# Altium PCB JacdacCableExtender 38.PcbDoc
Units mm, origin at the board's own origin, x right, y up, seen from the top; angles counter-clockwise.
Board outline 6.54 x 11 mm, 2 copper layers (Top Layer, Bottom Layer), stack 1.525 mm thick; 2 components, 3 nets, 21 pads, 4 vias.
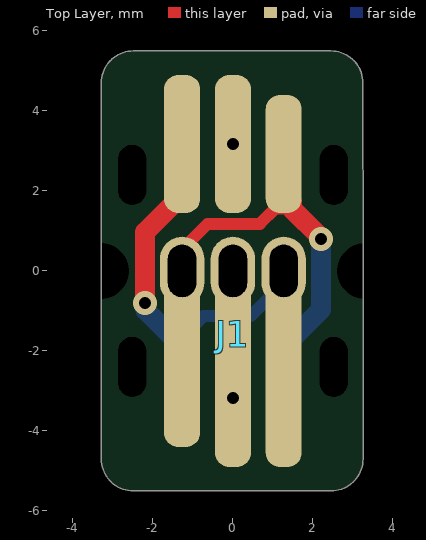
[diagram p0: Top Layer view]
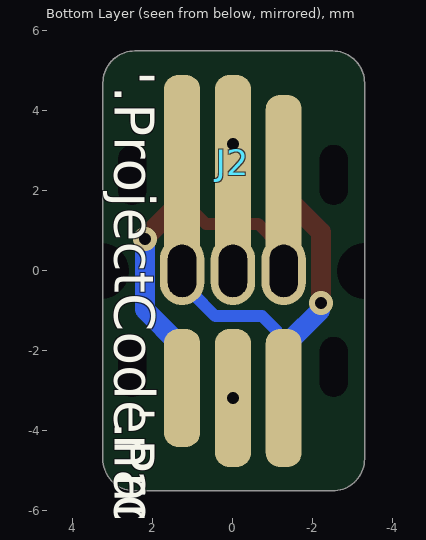
[diagram p1: Bottom Layer view, seen from below]

## Layer stack, top to bottom
Top Solder: solder mask 0.0102, Solder Resist, Dk 3.5
Top Layer: signal copper 0.0356
Dielectric 1: core 1.454, FR-4, Dk 4.2
Bottom Layer: signal copper 0.0356
Bottom Solder: solder mask 0.0102, Solder Resist, Dk 3.5

## Board outline
-3.29,-4.7 -3.29,0.35 -3.29,4.7 cw(c-2.49,4.7) -2.49,5.5 2.45,5.5 cw(c2.45,4.7) 3.25,4.7 3.253,0.35 3.253,-4.7 cw(c2.451,-4.699) 2.45,-5.5 -2.49,-5.5 cw(c-2.49,-4.7)

## Design rules (kind name [scope] priority, off if disabled: settings)
AssemblyTestPointUsage [All] p1: valid=2
BoardOutlineClearance BoardOutlineClearance_LayerNameText [(StringText='Top Layer') Or (StringText='Bottom Layer') Or (StringText='Top Overlay') Or (StringText='Bottom Overlay')] p1: gap=0.3 ignorepadtopadclearanceinfootprint=FALSE except(0: Arc-OutlineEdge Arc-SplitContinuation Track-SplitContinuation SMDPad-SplitContinuation THPad-OutlineEdge THPad-SplitContinuation Via-SplitContinuation Fill-SplitContinuation Poly-OutlineEdge Poly-SplitContinuation Region-OutlineEdge Region-SplitContinuation Text-OutlineEdge Text-CavityEdge Text-CutoutEdge Text-SplitBarrior Text-SplitContinuation; 0.2: Fill-OutlineEdge Fill-CavityEdge Fill-CutoutEdge Fill-SplitBarrior) // do not generate errors for the text that simply highlights the layer names (for gerbers)
BoardOutlineClearance [All] p2: gap=0.3 ignorepadtopadclearanceinfootprint=FALSE except(0: Arc-OutlineEdge Arc-SplitContinuation Track-SplitContinuation SMDPad-SplitContinuation THPad-OutlineEdge THPad-SplitContinuation Via-SplitContinuation Fill-SplitContinuation Poly-OutlineEdge Poly-SplitContinuation Region-OutlineEdge Region-SplitContinuation Text-SplitContinuation; 0.2: Fill-OutlineEdge Fill-CavityEdge Fill-CutoutEdge Fill-SplitBarrior Text-OutlineEdge Text-CavityEdge Text-CutoutEdge Text-SplitBarrior)
Clearance [All] p1: gap=0.125 ignorepadtopadclearanceinfootprint=FALSE except(0: Arc-Hole Track-Hole SMDPad-Hole THPad-Hole Via-Hole Fill-Hole Poly-Hole Region-Hole Text-Hole)
DiffPairsRouting [All] p1: maxlimit=2 minlimit=0.15 mostfreqgap=0.15 toplayer_minwidth=0.15 toplayer_maxwidth=2 toplayer_prefwidth=0.15 bottomlayer_minwidth=0.15 bottomlayer_maxwidth=2 bottomlayer_prefwidth=0.15 substack1={CB9D278B-8BF5-444A-AAF4-837A2A9DF42D} toplayer_{cb9d278b-8bf5-444a-aaf4-837a2a9df42d}_minwidth=0.381 toplayer_{cb9d278b-8bf5-444a-aaf4-837a2a9df42d}_maxwidth=0.381 toplayer_{cb9d278b-8bf5-444a-aaf4-837a2a9df42d}_prefwidth=0.381 bottomlayer_{cb9d278b-8bf5-444a-aaf4-837a2a9df42d}_minwidth=0.381 bottomlayer_{cb9d278b-8bf5-444a-aaf4-837a2a9df42d}_maxwidth=0.381 bottomlayer_{cb9d278b-8bf5-444a-aaf4-837a2a9df42d}_prefwidth=0.381 substack2={826B8647-A721-4255-895A-19F9591B9CD1} toplayer_{826b8647-a721-4255-895a-19f9591b9cd1}_minwidth=0.381 toplayer_{826b8647-a721-4255-895a-19f9591b9cd1}_maxwidth=0.381 toplayer_{826b8647-a721-4255-895a-19f9591b9cd1}_prefwidth=0.381 bottomlayer_{826b8647-a721-4255-895a-19f9591b9cd1}_minwidth=0.381 bottomlayer_{826b8647-a721-4255-895a-19f9591b9cd1}_maxwidth=0.381 bottomlayer_{826b8647-a721-4255-895a-19f9591b9cd1}_prefwidth=0.381 substack3={E64FCAF4-1BC8-437D-B1E0-0E5F2DC0F59E} toplayer_{e64fcaf4-1bc8-437d-b1e0-0e5f2dc0f59e}_minwidth=0.381 toplayer_{e64fcaf4-1bc8-437d-b1e0-0e5f2dc0f59e}_maxwidth=0.381 toplayer_{e64fcaf4-1bc8-437d-b1e0-0e5f2dc0f59e}_prefwidth=0.381 bottomlayer_{e64fcaf4-1bc8-437d-b1e0-0e5f2dc0f59e}_minwidth=0.381 bottomlayer_{e64fcaf4-1bc8-437d-b1e0-0e5f2dc0f59e}_maxwidth=0.381 bottomlayer_{e64fcaf4-1bc8-437d-b1e0-0e5f2dc0f59e}_prefwidth=0.381 substack4={E61CE66C-507C-4E1E-8E83-C905434AFC1C} toplayer_{e61ce66c-507c-4e1e-8e83-c905434afc1c}_minwidth=0.381 toplayer_{e61ce66c-507c-4e1e-8e83-c905434afc1c}_maxwidth=0.381 toplayer_{e61ce66c-507c-4e1e-8e83-c905434afc1c}_prefwidth=0.381 bottomlayer_{e61ce66c-507c-4e1e-8e83-c905434afc1c}_minwidth=0.381 bottomlayer_{e61ce66c-507c-4e1e-8e83-c905434afc1c}_maxwidth=0.381 bottomlayer_{e61ce66c-507c-4e1e-8e83-c905434afc1c}_prefwidth=0.381 maxuncoupledlength=25
FabricationTestPointUsage [All] p1: valid=2 allowmultiple=FALSE
HoleSize [All] p1: absolutevalues=TRUE maxlimit=2.54 minlimit=0.2 maxpercent=80.000 minpercent=20.000
HoleToHoleClearance HoleToHoleClearance_J10_J11 [InComponent('J10') vs InComponent('J11')] p1: gap=0 allowstackedmicrovias=TRUE
HoleToHoleClearance [All] p2: gap=0.254 allowstackedmicrovias=TRUE
MinimumSolderMaskSliver [All] p1: minsoldermaskwidth=0.005
PlaneClearance [All] p1: clearance=0.3
PlaneConnect [All] p1: planeconnectstyle=Relief reliefexpansion=0.5 reliefentries=4 reliefconductorwidth=0.2 reliefairgap=0.3
PolygonConnect "PolygonConnect GND" [isVIA] p1: connectstyle=Relief reliefconductorwidth=0.2 reliefentries=4 polygonreliefangle="90 Angle" airgapwidth=0.2
PolygonConnect [All] p2: connectstyle=Relief reliefconductorwidth=0.2 reliefentries=4 polygonreliefangle="90 Angle" airgapwidth=0.2
RoutingVias [All] p1: holewidth=0.3 width=0.6 viastyle="Through Hole" minholewidth=0.3 minwidth=0.6 maxholewidth=0.3 maxwidth=0.8
ShortCircuit ShortCircuit_J10_J11 [InComponent('J10') vs InComponent('J11')] p1: allowed=TRUE
ShortCircuit [All] p2: allowed=FALSE
SilkToSilkClearance [All] p1: silktosilkclearance=0.001
SilkToSolderMaskClearance [IsPad] p1: minsilkscreentomaskgap=0.05 clearancetoexposedcopper=TRUE
SolderMaskExpansion [All] p1: expansion=0.075 istentingtop=FALSE
Width [All] p1: maxlimit=2 minlimit=0.15 preferedwidth=0.15 substack1={CB9D278B-8BF5-444A-AAF4-837A2A9DF42D} substack2={826B8647-A721-4255-895A-19F9591B9CD1} substack3={E64FCAF4-1BC8-437D-B1E0-0E5F2DC0F59E} substack4={E61CE66C-507C-4E1E-8E83-C905434AFC1C} minimp=50.000000 maximp=50.000000 favimp=50.000000
19 further rules are at their usual default settings.

## Components (designator, comment, footprint, x,y, rotation, side; value= is the part's Value field where it differs from the comment)
J1 "Jacdac edge connector" JACDAC_EDGE_CONNECTOR_0.2mm_T&G#1 0,0.25 r180 top
J2 "Jacdac edge connector" JACDAC_EDGE_CONNECTOR_0.2mm_T&G#2 0,-0.25 r180 bottom

## Footprints (in the part's own frame and the unit in brackets; to place one, negate y for a bottom-side part, rotate by r counter-clockwise, add the part's x,y. Pads: shape width x height; smd on the part's side, far side on the other; paste and mask are expansions set on the pad)
JACDAC_EDGE_CONNECTOR_0.2mm_T&G#1 [mm] "JacDac 3 pin connector with traces for 0.2mm T&G"
  rrect78% 0.9x2.95 smd far side paste-1 mask+0: 1(-1.27,3.175)
  rrect78% 0.9x4.3 smd paste-1 mask+0: 1(1.27,2.5)
  oval 1.11x1.71 hole 0.71 slot 1.31 at 90 deg paste-0.254 mask+0: 1(1.27,0.25) 2(0,0.25) 3(-1.27,0.25)
  rrect78% 0.9x3.45 smd far side paste-1 mask+0: 2(0,3.425) 3(1.27,3.425)
  rrect78% 0.9x4.8 smd paste-1 mask+0: 2(0,2.75) 3(-1.27,2.75)
  round 0 hole 0.7 slot 1.5 at 90 deg unplated: ""(-2.52,2.65) ""(2.52,2.65)
  Bottom Layer lines w0.2: -1.126,0.85 -1.186,0.85 -1.27,0.85
JACDAC_EDGE_CONNECTOR_0.2mm_T&G#2 [mm] "JacDac 3 pin connector with traces for 0.2mm T&G"
  rrect78% 0.9x2.95 smd far side paste-1 mask+0: 1(-1.27,3.175)
  rrect78% 0.9x4.3 smd paste-1 mask+0: 1(1.27,2.5)
  rrect78% 0.9x4.8 smd paste-1 mask+0: 2(0,2.75) 3(-1.27,2.75)
  rrect78% 0.9x3.45 smd far side paste-1 mask+0: 2(0,3.425) 3(1.27,3.425)
  round 0 hole 0.7 slot 1.5 at 90 deg unplated: ""(-2.52,2.65) ""(2.52,2.65)
  Bottom Layer lines w0.2: -1.126,0.85 -1.27,0.85
  Bottom Layer lines w0.3: 1.126,0.7 1.126,0.929 0.63,1.425

## Part data
J1 J2: "3 pin Jacdac edge connector 1.27mm pitch", Manufacturer Part Number=JACDAC_EDGE_CONNECTOR, Checked By=?, ComponentLink1Description="Yuliang JACDAC cable connector drawing online", ComponentLink1URL=https://github.com/microsoft/jacdac-mdk/blob/main/connector/JACDAC-Connector-by-Yuliang-2020-11-28.pdf, ComponentLink2Description="JACDAC PCB edge connector spec onlin", ComponentLink2URL=https://github.com/microsoft/jacdac-mdk/blob/main/connector/JACDAC_PCB_Edge_Connector_Drawing_JD-PEC-01_rev_01.pdf, Created By="D. Gakure", PCB Type="1.6mm FR4"

## Free pads (board coordinates)
  round 0 hole 1.4 unplated: 9(-3.3,0) 9(3.3,0)

## Via types
v1: diameter 0.6, hole 0.3, Top Layer to Bottom Layer, tented both sides, 4 vias

## Nets (pads, with @x,y where several pads share a name; then routed paths per layer and width w, separated by ;. In a path a pad name is that pad's centre, name@x,y a point inside that pad or via, vN(x,y) a via of type N, cw(c..) or ccw(c..) an arc to the next point about the centre after c; other vN are vias at no path point)
NetJ1_1: J1.1 J2.1 | length 6.6
  Top Layer w0.3: -0.63,1.175 0.675,1.175 1.063,1.563 J2.1@1.307,1.563
  Top Layer w0.5: J2.1@1.27,1.92 1.28,1.92 1.474,1.726 1.474,1.553 2.2,0.827 v1(2.2,0.8)
  Bottom Layer w0.5: J1.1@1.315,-1.855 2.2,-0.97 v1(2.2,0.8)
NetJ1_2: J1.2 J2.2
  other v1: 0,-3.175 0,3.175
NetJ1_3: J1.3 J2.3 | length 12.1
  Top Layer w0.5: v1(-2.2,-0.8) -2.2,0.97 -1.27,1.9 J2.3@-1.27,2.875
  Bottom Layer w0.3: J1.3@-1.27,-3.175 -1.27,-1.67 -1.149,-1.67 -1.094,-1.615 -1.094,-1.494 -0.73,-1.13 0.44,-1.13 1.005,-0.565 1.125,-0.565 1.189,-0.5 1.189,-0.297 J1.3@1.27,-0.216 ; J1.3@1.086,-0.4 1.086,-0.184 J1.3@1.27,0
  Bottom Layer w0.5: v1(-2.2,-0.8) -2.181,-0.819 -2.181,-0.989 -1.435,-1.735 -1.39,-1.735 -1.27,-1.855 J1.3@-1.27,-3.075
pads on no net: J1. J2.

## Other copper
Top Layer:
  text "Top Layer" at 25.001,7.65 h1.7
Bottom Layer:
  text "Bottom Layer" at 25,6.15 h1.7

## Silkscreen, mask and mechanical layers (free items; w line width, h text height)
Top Overlay:
  text "Top Overlay" at 25.001,-0.65 h1.7
Bottom Overlay:
  text "'.ProjectCodenameID'" at 2.95,5 h1 r90
  text "Bottom Overlay" at 25,-2.15 h1.7
  text "'.ProjectRevision'" at 2.95,-3.4 h1 r90
Top Paste:
  text "Top Paste" at 25.001,-3.557 h1.7
Bottom Paste:
  text "Bottom Paste" at 25,-5.035 h1.7
Top Solder:
  text "Top Solder (resist)" at 25.001,-6.357 h1.7
Bottom Solder:
  text "Bottom Solder (resist)" at 25,-7.848 h1.7
Fab Notes:
  lines w0.1: -3.312,0.38 -2.712,0.98 2.683,0.98 5.6,0.98 ; -2.635,-2.927 -1.507,-4.027 3.36,-4.027 5.585,-4.027 ; -2.612,2.78 -1.484,3.88 3.383,3.88 5.608,3.88 ; -1.08,-0.444 -0.041,-1.483 2.364,-1.483 ; 0.123,-0.444 1.161,-1.483 ; 1.322,-0.441 2.364,-1.483 ; 2.635,-2.802 3.838,-4.027 ; 2.658,2.655 3.86,3.88 ; 3.416,0.255 4.141,0.98 ; 5.667,-1.483 2.364,-1.483
  text "do not add any PCB  / manufacturer identifiers" at 7.8,10.8 h1.7
  text "no board edge pips/ / rat's teeth/mouse bites" at 7.8,7.5 h1.7
  text "Fabrication Notes" at 25,4.865 h1.7
  text "non-plated slots x2" at 5.901,3.593 h1.7
  text "non-plated drill holes that cross the  / board outline will end up as half-holes" at 5.909,-0.032 h1.7
  text "plated slots x3" at 5.931,-1.99 h1.7
  text "non-plated slots x2" at 5.926,-4.357 h1.7
Board Outline:
  the board outline again, w0.2
  text "Board Outline" at 25,3.565 h1.7
Top Assy:
  text "Top Assy" at 25.001,2.25 h1.7
Bottom Assy:
  text "Bottom Assy" at 25,0.85 h1.7

## Text inside footprints (layer, text, board x,y; h text height)
J1: Mechanical 9 "JACDAC  / cable connector  / body" at 4.821,-9.758 h1.7 r180; Top Courtyard "board outline  / for 'outie'" at -5.14,-0.614 h1.2 r180
J2: Mechanical 9 "JACDAC  / cable connector  / body" at 4.821,9.758 h1.7; Bottom Courtyard "board outline  / for 'outie'" at -5.14,0.614 h1.2